# Altium PCB PCB-v1.PcbDoc
Units mm, origin at the board's own origin, x right, y up, seen from the top; angles counter-clockwise.
Board outline 50 x 50 mm, 2 copper layers (Top Layer, Bottom Layer); 47 components, 31 nets, 206 pads, 12 vias.
Unrouted connection lines stored in the file: 48.
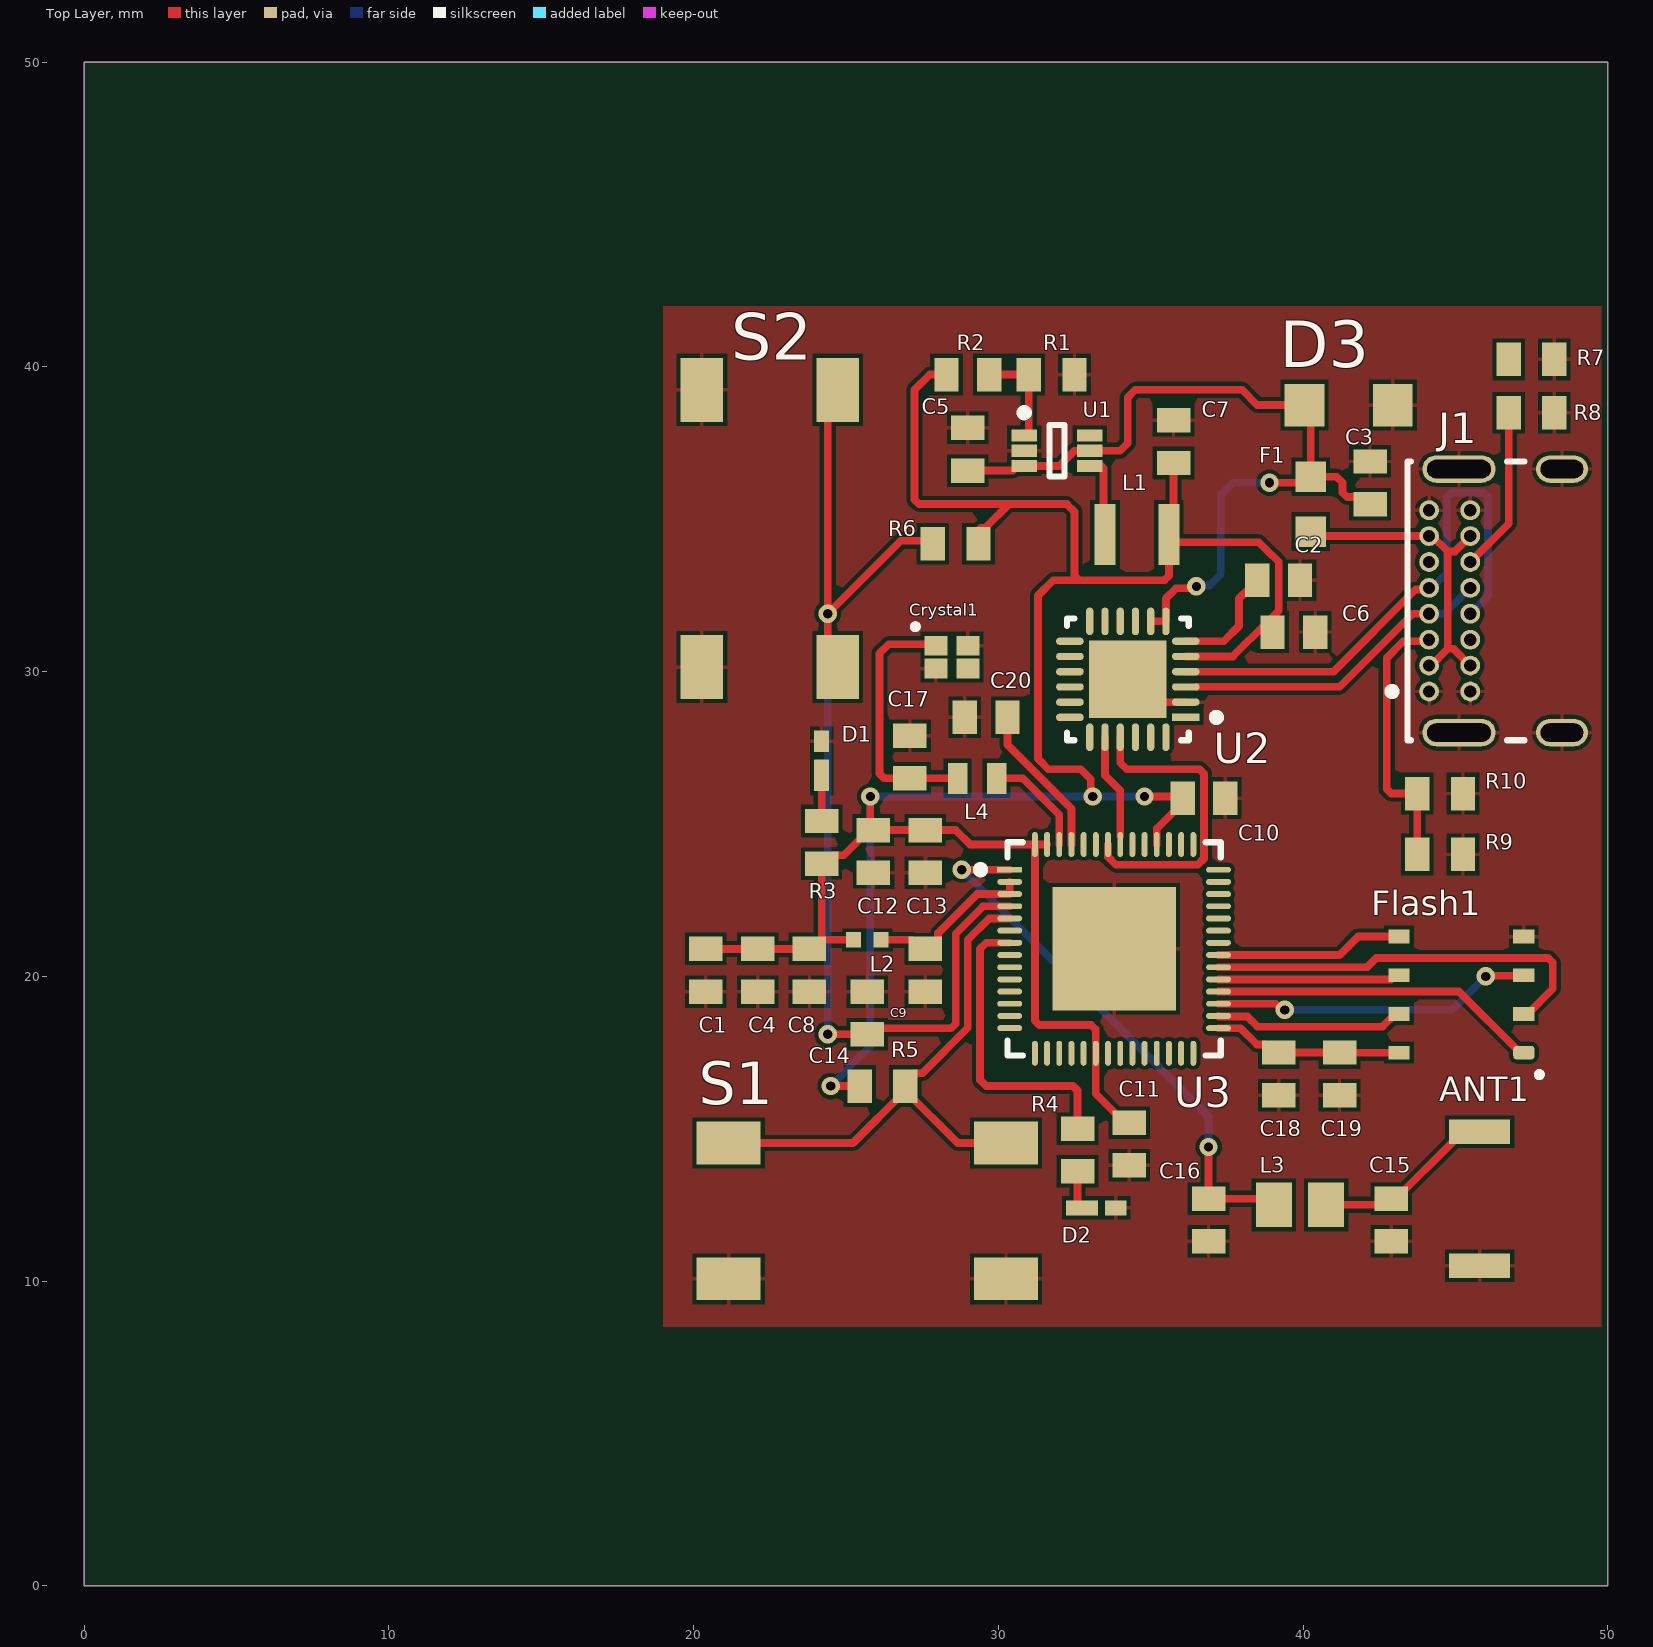
[diagram p0: Top Layer view]
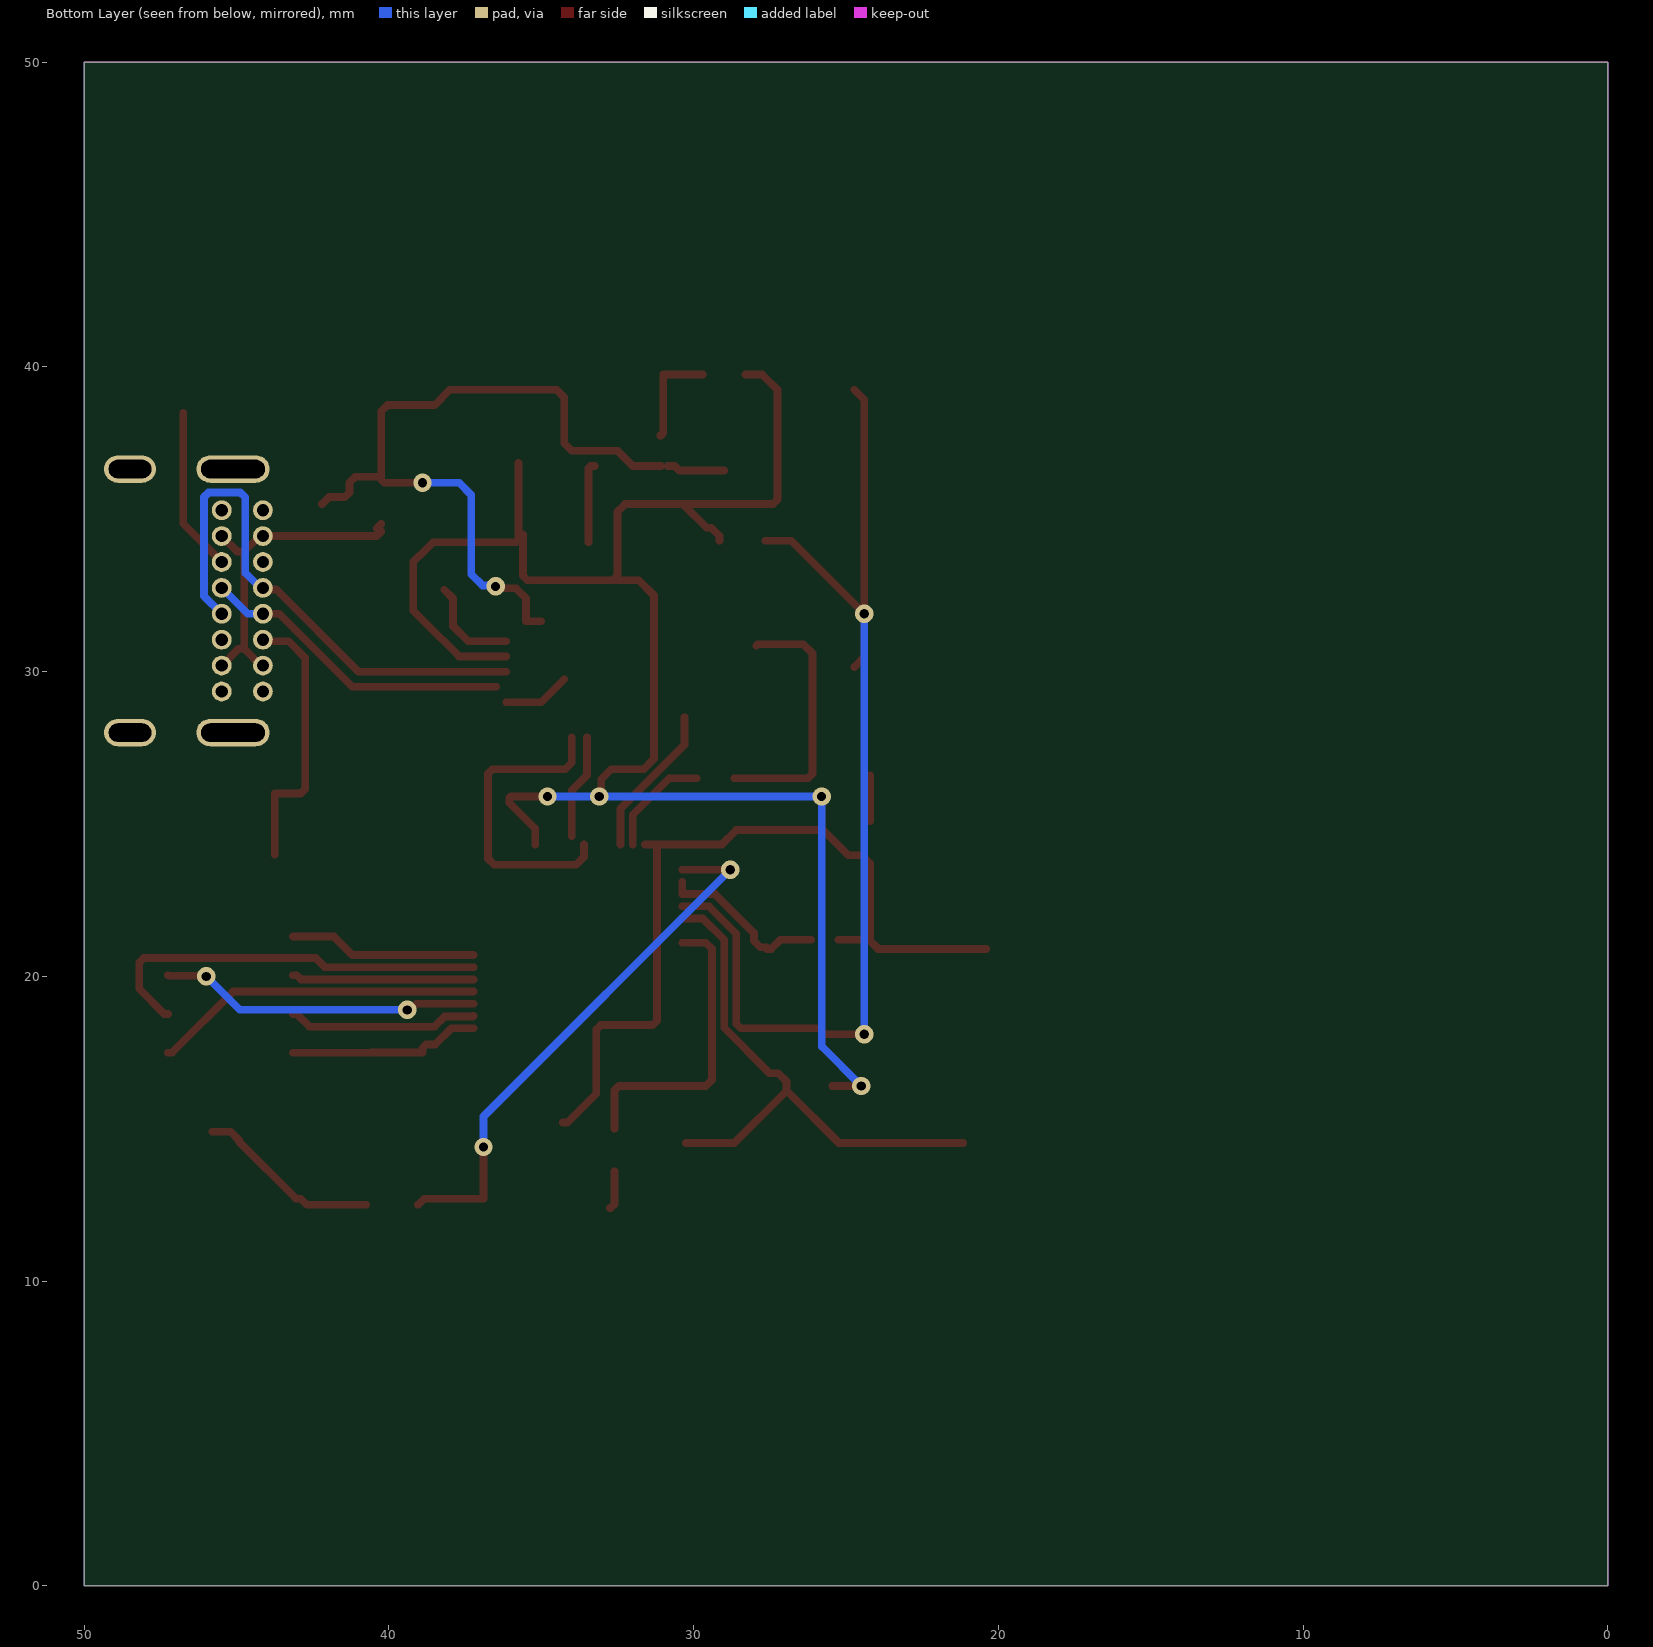
[diagram p1: Bottom Layer view, seen from below]

## Layer stack, top to bottom
Top Solder: solder mask 0.0102, Solder Resist, Dk 3.5
Top Layer: signal copper 0.0356
Dielectric 1: dielectric 0.32, FR-4, Dk 4.8
Bottom Layer: signal copper 0.0356
Bottom Solder: solder mask 0.0102, Solder Resist, Dk 3.5

## Board outline
0,0 50,0 50,50 0,50

## Design rules (kind name [scope] priority, off if disabled: settings)
BoardOutlineClearance [All] p1: gap=0.2 ignorepadtopadclearanceinfootprint=FALSE
Clearance [All] p1: gap=0.127 ignorepadtopadclearanceinfootprint=TRUE except(0.254: Arc-Hole Track-Hole SMDPad-Hole THPad-Hole Via-Hole Fill-Hole Poly-Hole Region-Hole Text-Hole)
ComponentClearance [All] p1: gap=0.127 collisioncheckmode=3 verticalgap=0.127 showdistances=TRUE
DiffPairsRouting [All] p1: maxlimit=0.254 minlimit=0.127 mostfreqgap=0.127 toplayer_minwidth=0.127 toplayer_maxwidth=25.4 toplayer_prefwidth=0.127 bottomlayer_minwidth=0.127 bottomlayer_maxwidth=25.4 bottomlayer_prefwidth=0.127 maxuncoupledlength=12.7
Height [All] p1: minheight=0 maxheight=1816.048 prefheight=12.7
HoleSize [All] p1: absolutevalues=TRUE maxlimit=6.3 minlimit=0.3 maxpercent=80.000 minpercent=20.000
HoleToHoleClearance [All] p1: gap=0.254 allowstackedmicrovias=FALSE
MinimumAnnularRing [All] p1: minimumring=0.152
MinimumSolderMaskSliver [All] p1: minsoldermaskwidth=0.152
PlaneClearance [All] p1: clearance=0.127
PlaneConnect PlaneConnectPowerPads [InPadClass('PowerPads')] p1: planeconnectstyle=Direct reliefexpansion=0.508 reliefentries=4 reliefconductorwidth=0.254 reliefairgap=0.254
PlaneConnect [All] p2: pad.planeconnectstyle=Relief pad.reliefexpansion=0.3 pad.reliefentries=4 pad.reliefconductorwidth=0.127 pad.reliefairgap=0.127 via.planeconnectstyle=Direct via.reliefexpansion=0.3 via.reliefentries=4 via.reliefconductorwidth=0.127 via.reliefairgap=0.127
PolygonConnect PolygonConnectPowerPads [All vs (InPadClass('PowerPads'))] p1: connectstyle=Direct reliefconductorwidth=0.254 reliefentries=4 polygonreliefangle="90 Angle" airgapwidth=0.254
PolygonConnect [All] p2: thpad.connectstyle=Relief thpad.reliefconductorwidth=0.127 thpad.reliefentries=4 thpad.polygonreliefangle="90 Angle" thpad.airgapwidth=0.127 smdpad.connectstyle=Relief smdpad.reliefconductorwidth=0.127 smdpad.reliefentries=4 smdpad.polygonreliefangle="90 Angle" smdpad.airgapwidth=0.127 via.connectstyle=Direct via.reliefconductorwidth=0.127 via.reliefentries=4 via.polygonreliefangle="90 Angle" via.airgapwidth=0.127
RoutingVias [All] p1: holewidth=0.3 width=0.6 viastyle="Through Hole" minholewidth=0.3 minwidth=0.6 maxholewidth=0.6 maxwidth=6.6
SilkToSilkClearance [All] p1: silktosilkclearance=0.127
SilkToSolderMaskClearance [IsPad] p1: minsilkscreentomaskgap=0.127 clearancetoexposedcopper=TRUE
SolderMaskExpansion [All] p1: expansion=0.051 istentingtop=FALSE
SupplyNets "Schematic Supply Nets_4" [InNet('+3.3V')] p1: voltage=0.000
SupplyNets "Schematic Supply Nets_1" [InNet('GND')] p2: voltage=0.000
UnRoutedNet [All] p1: checkbadconnections=TRUE
Width Width_10mil [All] p1: maxlimit=25.4 minlimit=0.254 preferedwidth=0.254 minimp=50.000000 maximp=50.000000 favimp=50.000000
Width Width_6mil [All] p2: maxlimit=25.4 minlimit=0.152 preferedwidth=0.152 minimp=50.000000 maximp=50.000000 favimp=50.000000
Width Power_20mil [All] p3: maxlimit=25.4 minlimit=0.508 preferedwidth=0.508 minimp=50.000000 maximp=50.000000 favimp=50.000000
Width Power_12mil [All] p4: maxlimit=25.4 minlimit=0.305 preferedwidth=0.305 minimp=50.000000 maximp=50.000000 favimp=50.000000
Width Width_5mil [All] p5: maxlimit=25.4 minlimit=0.127 preferedwidth=0.127 minimp=50.000000 maximp=50.000000 favimp=50.000000
19 further rules are at their usual default settings.

## Components (designator, comment, footprint, x,y, rotation, side; value= is the part's Value field where it differs from the comment)
ANT1 "PCB_ANT" "Antenne // RFANT5220110A0T" 45.8,12.7 r270 top
C1 "10µF" CAP_General_0603 20.4,20.2 r90 top
C2 "1µF" CAP_General_0603 39.2,33 r0 top
C3 "10pF" CAP_General_0603 42.2,36.2 r270 top
C4 "1µF" CAP_General_0603 22.1,20.2 r90 top
C5 "4.7µF" CAP_General_0603 29,37.3 r270 top
C6 "1µF" CAP_General_0603 39.7,31.3 r0 top
C7 "1µF" CAP_General_0603 35.75,37.55 r270 top
C8 "0.1µF" CAP_General_0603 23.8,20.2 r90 top
C9 "0.1µF" CAP_General_0603 27.6,20.2 r90 top
C10 "0.1µF" CAP_General_0603 36.75,25.85 r0 top
C11 "0.1µF" CAP_General_0603 34.3,14.5 r90 top
C12 "1µF" CAP_General_0603 25.9,24.1 r90 top
C13 "10nF" CAP_General_0603 27.6,24.1 r90 top
C14 "0.1µF" CAP_General_0603 25.7,18.8 r270 top
C15 "1pF" CAP_General_0603 42.9,12 r90 top
C16 "1pF" CAP_General_0603 36.9,12 r90 top
C17 "10pF" CAP_General_0603 27.1,27.2 r90 top
C18 "0.1µF" CAP_General_0603 39.2,16.8 r90 top
C19 "10µF" CAP_General_0603 41.2,16.8 r90 top
C20 "10pF" CAP_General_0603 29.6,28.5 r180 top
Crystal1 "Crystal" "Crystal // ECS­400­8­47B2­CKM­TR" 28.475,30.475 r0 top
D1 "LED" "LED // KRDELPS1.22-UIVG-46-H3Q4-XX" 24.2,27.157 r90 top
D2 "LED" "LED // KRDELPS1.22-UIVG-46-H3Q4-XX" 33.3,12.4 r0 top
D3 "ESD diode 5V" "ESD diode 5V // SMF5.0A" 41.5,38.75 r0 top
F1 "Fuse" "Fuse // 0603L050SLYR" 40.25,35.5 r90 top
Flash1 "128 Mbit NOR Flash" "128 Mbit NOR Flash // AT25QF128A-MHB-T" 45.2,19.4 r180 top
J1 "USB4085-GF-A" "USB-C connector // USB4085-GF-A" 48.165,32.325 r90 top
L1 "1µH" "Inductor 1µH // MLP2520H1R0MT0S1" 34.55,34.5 r0 top
L2 "2nH" "Inductor 2nH // MLG1005S2N0BTD25" 25.7,21.2 r0 top
L3 "3.3nH" "Inductor 3.3nH // AIMC-0805-3N3" 39.9,12.5 r180 top
L4 "24nH" "Inductor 24 nH // 36501J24NJTDG" 29.3,26.5 r0 top
R1 "100K" RES_100K_0603 31.75,39.75 r180 top
R2 "453K" RES_453K_0603 29,39.75 r180 top
R3 "499R" RES_499R_0603 24.2,24.4 r90 top
R4 "499R" RES_499R_0603 32.6,14.3 r270 top
R5 "10K" RES_10K_0603_1 26.2,16.4 r0 top
R6 "10K" RES_10K_0603_1 28.6,34.2 r0 top
R7 "10K" RES_10K_0603_1 47.5,40.25 r180 top
R8 "10K" RES_10K_0603_1 47.5,38.5 r180 top
R9 "10K" RES_10K_0603_1 44.5,24 r180 top
R10 "10K" RES_10K_0603_1 44.5,26 r180 top
S1 "Drukknop" "Tactile Switches // FSM4JSMAATR" 25.7,12.3 r90 top
S2 "Drukknop" "Tactile Switches // FSM4JSMAATR" 22.5,34.7 r0 top
U1 "Convertor 5V-3.3V" "CONVERTOR // TLV62569APDRLR" 31.925,37.25 r0 top
U2 "CP2102N-A02-GQFN24R" "USB Bridge // CP2102N-A02-GQFN24R" 34.25,29.75 r180 top
U3 "ESP32-S3R8" FP-ESP32-S3R8 33.8,20.9 r0 top

## Footprints (in the part's own frame and the unit in brackets; to place one, negate y for a bottom-side part, rotate by r counter-clockwise, add the part's x,y. Pads: shape width x height; smd on the part's side, far side on the other; paste and mask are expansions set on the pad)
"128 Mbit NOR Flash // AT25QF128A-MHB-T" [mm]
  rrect50% 0.7x0.45 smd: 1(-2.05,1.905)
  rect 0.7x0.45 smd: 2(-2.05,0.635) 3(-2.05,-0.635) 4(-2.05,-1.905) 5(2.05,-1.905) 6(2.05,-0.635) 7(2.05,0.635) 8(2.05,1.905)
  silkscreen extent -2.64,2.55 -2.48,2.71
"Antenne // RFANT5220110A0T" [mm]
  rect 0.8x2 smd: 1(-2.2,0) 2(2.2,0)
CAP_General_0603 [mm] "Chip Capacitor, 2-Leads, Body 1,60x0,80mm, IPC Medium Density"
  rect 0.8x1.1 smd: 1(-0.7,0) 2(0.7,0)
  body extent -0.85,-0.45 0.85,0.45, height 0.7
"CONVERTOR // TLV62569APDRLR" [mm] "SOT23, 6-Leads, Body 1,60x2,15mm, Pitch 0,50mm, IPC Medium Density"
  rect 0.85x0.4 smd: 1(-1.075,0.5) 2(-1.075,0) 3(-1.075,-0.5) 4(1.075,-0.5) 5(1.075,0) 6(1.075,0.5)
  silkscreen extent -1.2,-0.85 0.25,1.37, body extent -0.65,-0.85 0.65,0.85, height 0.6
"Crystal // ECS­400­8­47B2­CKM­TR" [mm] "40 MHz Crystal"
  rect 0.75x0.65 smd: 1(-0.525,0.375) 2(-0.525,-0.375) 3(0.525,-0.375) 4(0.525,0.375)
  silkscreen extent -1.28,0.92 -1.12,1.08
"ESD diode 5V // SMF5.0A" [mm]
  rect 1.3x1.4 smd: 1(-1.45,0) 2(1.45,0)
FP-ESP32-S3R8 [mm]
  rect 0.818x0.192 smd paste+0 mask+0: 1(-3.427,2.6)
  rrect100% 0.818x0.192 smd paste+0 mask+0: 2(-3.427,2.2) 3(-3.427,1.8) 4(-3.427,1.4) 5(-3.427,1) 6(-3.427,0.6) 7(-3.427,0.2) 8(-3.427,-0.2) 9(-3.427,-0.6) 10(-3.427,-1) 11(-3.427,-1.4) 12(-3.427,-1.8) 13(-3.427,-2.2) 14(-3.427,-2.6) 29(3.427,-2.6) 30(3.427,-2.2) 31(3.427,-1.8) 32(3.427,-1.4) 33(3.427,-1) 34(3.427,-0.6) 35(3.427,-0.2) 36(3.427,0.2) 37(3.427,0.6) 38(3.427,1) 39(3.427,1.4) 40(3.427,1.8) 41(3.427,2.2) 42(3.427,2.6)
  rrect100% 0.192x0.818 smd paste+0 mask+0: 15(-2.6,-3.427) 16(-2.2,-3.427) 17(-1.8,-3.427) 18(-1.4,-3.427) 19(-1,-3.427) 20(-0.6,-3.427) 21(-0.2,-3.427) 22(0.2,-3.427) 23(0.6,-3.427) 24(1,-3.427) 25(1.4,-3.427) 26(1.8,-3.427) 27(2.2,-3.427) 28(2.6,-3.427) 43(2.6,3.427) 44(2.2,3.427) 45(1.8,3.427) 46(1.4,3.427) 47(1,3.427) 48(0.6,3.427) 49(0.2,3.427) 50(-0.2,3.427) 51(-0.6,3.427) 52(-1,3.427) 53(-1.4,3.427) 54(-1.8,3.427) 55(-2.2,3.427) 56(-2.6,3.427)
  rect 4.05x4.05 smd paste-1000 mask+0: 57(0,0)
  silkscreen extent -4.51,-3.5 3.5,3.5, body extent -4.1,-4.09 4.07,4.09, height 0.25
"Fuse // 0603L050SLYR" [mm]
  rect 1x1 smd: 1(-0.9,0) 2(0.9,0)
"Inductor 1µH // MLP2520H1R0MT0S1" [mm]
  rect 0.7x2 smd: 1(-1.05,0) 2(1.05,0)
"Inductor 2nH // MLG1005S2N0BTD25" [mm]
  rect 0.5x0.5 smd: 1(-0.45,0) 2(0.45,0)
"Inductor 3.3nH // AIMC-0805-3N3" [mm] "Chip Inductor, 2-Leads, Body 2,00x1,25mm, IPC Medium Density"
  rect 1.19x1.47 smd: 1(-0.855,0) 2(0.855,0)
  body extent -1.1,-0.72 1.1,0.72, height 1.05
"Inductor 24 nH // 36501J24NJTDG" [mm]
  rect 0.64x1.02 smd: 1(-0.64,0) 2(0.64,0)
"LED // KRDELPS1.22-UIVG-46-H3Q4-XX" [mm]
  rect 1.05x0.5 smd: 1(-0.557,0)
  rect 0.7x0.5 smd: 2(0.557,0)
RES_10K_0603_1 [mm] "Chip Resistor, 2-Leads, Body 1,55x0,80mm, IPC Medium Density"
  rect 0.8x1.1 smd: 1(-0.75,0) 2(0.75,0)
  body extent -0.83,-0.45 0.82,0.45, height 0.55
RES_100K_0603 [mm] "Chip Resistor, 2-Leads, Body 1,60x0,80mm, IPC Medium Density"
  rect 0.8x1.1 smd: 1(-0.75,0) 2(0.75,0)
  body extent -0.9,-0.5 0.9,0.5, height 0.65
RES_453K_0603 [mm] "Chip Resistor, 2-Leads, Body 1,55x0,80mm, IPC Medium Density"
  rect 0.8x1.1 smd: 1(-0.7,0) 2(0.7,0)
  body extent -0.83,-0.45 0.82,0.45, height 0.55
RES_499R_0603 [mm] "Chip Resistor, 2-Leads, Body 1,55x0,85mm, IPC Medium Density"
  rect 0.8x1.1 smd: 1(-0.7,0) 2(0.7,0)
  body extent -0.8,-0.48 0.8,0.47, height 0.55
"Tactile Switches // FSM4JSMAATR" [mm]
  rect 1.4x2.1 smd: 1(2.23,4.55) 2(2.23,-4.55) 3(-2.23,4.55) 4(-2.23,-4.55)
"USB Bridge // CP2102N-A02-GQFN24R" [mm]
  rect 0.91x0.239 smd paste+0 mask+0: 1(-1.901,1.25)
  rrect100% 0.91x0.239 smd paste+0 mask+0: 2(-1.901,0.75) 3(-1.901,0.25) 4(-1.901,-0.25) 5(-1.901,-0.75) 6(-1.901,-1.25) 13(1.901,-1.25) 14(1.901,-0.75) 15(1.901,-0.25) 16(1.901,0.25) 17(1.901,0.75) 18(1.901,1.25)
  rrect100% 0.239x0.91 smd paste+0 mask+0: 7(-1.25,-1.901) 8(-0.75,-1.901) 9(-0.25,-1.901) 10(0.25,-1.901) 11(0.75,-1.901) 12(1.25,-1.901) 19(1.25,1.901) 20(0.75,1.901) 21(0.25,1.901) 22(-0.25,1.901) 23(-0.75,1.901) 24(-1.25,1.901)
  rect 2.55x2.55 smd paste-1000 mask+0: 25(0,0)
  silkscreen extent -3.03,-2 2,2, body extent -2.61,-2.61 2.61,2.61, height 0.25
"USB-C connector // USB4085-GF-A" [mm]
  rrect100% 0.9x2.4 hole 2.1 slot 0.6 at 0 deg paste-2539.97 mask+0: 1(-4.325,3.045) 2(4.325,3.045)
  rrect100% 0.9x1.7 hole 1.4 slot 0.6 at 0 deg paste-2539.97 mask+0: 3(-4.325,-0.335) 4(4.325,-0.335)
  round 0.65 hole 0.4 paste-2539.97 mask+0: A1(-2.975,4.025) A4(-2.125,4.025) A5(-1.275,4.025) A6(-0.425,4.025) A7(0.425,4.025) A8(1.275,4.025) A9(2.125,4.025) A12(2.975,4.025) B1(2.975,2.675) B4(2.125,2.675) B5(1.275,2.675) B6(0.425,2.675) B7(-0.425,2.675) B8(-1.275,2.675) B9(-2.125,2.675) B12(-2.975,2.675)
  silkscreen extent -4.57,0.89 4.57,5.37, body extent -4.87,-4.83 4.87,4.83, height 0.25

## Part data
ANT1: library part "Antenne // RFANT5220110A0T"
C1 C2 C3 C4 C5 C6 C7 C8 C9 C10 C11 C12 C13 C14 C15 C16 C17 C18 C19 C20: library part CAP_General_0603, "Capacitor SMD 0603 ?pF"
Crystal1: library part "Crystal // ECS­400­8­47B2­CKM­TR"
D1 D2: library part "LED // KRDELPS1.22-UIVG-46-H3Q4-XX"
D3: library part "ESD diode 5V // SMF5.0A"
F1: library part "Fuse // 0603L050SLYR"
Flash1: library part "128 Mbit NOR Flash // AT25QF128A-MHB-T"
J1: library part "USB-C connector // USB4085-GF-A", "CONN RCPT USB2.0 TYPE C 24POS RA", Contact Material="Copper Alloy", Contact Plating=Gold, Gender=Receptacle, Number of Positions=16, Orientation="Right Angle", USB Standard="USB 2.0"
L1: library part "Inductor 1µH // MLP2520H1R0MT0S1"
L2: library part "Inductor 2nH // MLG1005S2N0BTD25"
L3: library part "Inductor 3.3nH // AIMC-0805-3N3"
L4: library part "Inductor 24 nH // 36501J24NJTDG"
R1: library part RES_100K_0603, "Resistor SMD 0603 100K"
R2: library part RES_453K_0603, "Resistor SMD 0603 453K"
R3 R4: library part RES_499R_0603, "Resistor SMD 0603 499R"
R5 R6 R7 R8 R9 R10: library part RES_10K_0603_1, "Resistor SMD 0603 10K"
S1 S2: library part "Tactile Switches // FSM4JSMAATR"
U1: library part "Convertor // TLV62569APDRLR"
U2: library part "USB Bridge // CP2102N-A02-GQFN24R", "IC USB TO UART BRIDGE QFN24", Ambient Temperature Range High=85°C, Manufacturer Lifecycle Status="FULL PRODUCTION", Max Junction Temperature (Tj)=105°C, Max Supply Voltage=3.6V, Min Operating Temperature=-40°C, Min Supply Voltage=1.71V, Height=800µm, Interface="I2C, RS-485, UART, USB", Lifecycle Status=Production, Max Operating Temperature=85°C, NexarPartId=99772192, Number of Digital IO=4, Schedule B="8542390000, 8542390000|8542390000|8542390000|8542390000|8542390000"
U3: library part ESP32-S3, "ESP32-S3R8 RF System on a Chip - SoC SMD IC, Dual-Core MCU, Wi-Fi 2.4G BLE 5.0 Combo", NexarPartId=118292493

## Via types
v1: diameter 0.6, hole 0.3, Top Layer to Bottom Layer, 12 vias

## Nets (pads, with @x,y where several pads share a name; then routed paths per layer and width w, separated by ;. In a path a pad name is that pad's centre, name@x,y a point inside that pad or via, vN(x,y) a via of type N, cw(c..) or ccw(c..) an arc to the next point about the centre after c; other vN are vias at no path point)
+3.3V: C1.2 C4.2 C6.1 C7.2 C8.2 C10.1 C11.2 C12.2 C13.2 L1.2 L2.1 R2.2 R3.1 R5.1 R6.2 U2.5 U3.20 U3.46 U3.55 U3.56 | length 91.7
  Top Layer w0.254: C1.2 C4.2 C8.2 23.927,20.9 24.2,21.173 R3.1 24.473,23.973 24.923,23.973 25.75,24.8 C12.2 ; C8.2@23.95,20.9 24.25,21.2 L2.1 ; v1(24.5,16.4) R5.1 ; v1(25.8,25.9) 25.8,24.9 C12.2 ; R2.2 27.75,39.75 27.25,39.25 27.25,35.649 27.399,35.5 30.35,35.5 ; R6.2@29.15,34.3 29.15,34.45 29.423,34.723 29.573,34.723 30.35,35.5 ; U3.55 U3.56 ; v1(33.1,25.9) 33.034,25.966 33.034,26.466 32.7,26.8 31.639,26.8 31.3,27.139 31.3,32.5 31.8,33 32.649,33 ; C11.2 34.15,15.2 33.2,16.15 U3.20 33.2,18.251 33.051,18.4 31.349,18.4 31.2,18.549 U3.56 ; v1(34.8,25.9) 36,25.9 C10.1 36.05,25.7 35.2,24.85 U3.46 ; L1.2 L1.2@35.6,34.473 ; C7.2 L1.2@35.75,34.323 ; U2.5 37.7,30.5 38.825,31.625 39.2,32 39.2,33.609 39.005,33.804 38.996,33.804 38.55,34.25 35.823,34.25 L1.2@35.75,34.323 ; C12.2 C13.2 28.6,24.8 29.073,24.327 U3.56 ; 30.35,35.5 32.25,35.5 32.5,35.25 32.5,33.149 32.649,33 ; 32.649,33 35.451,33 35.6,33.149 L1.2@35.6,34.473 ; L1.2@35.6,34.473 L1.2@35.75,34.323
  Bottom Layer w0.254: v1(24.5,16.4) 25.8,17.7 v1(25.8,25.9) v1(33.1,25.9) v1(34.8,25.9)
+5V: C3.2 C5.2 D3.1 F1.2 U1.3 U1.5 U2.7 U2.8 | length 27.1
  Top Layer w0.254: C5.2 30.475,36.6 30.625,36.75 U1.3 ; U1.3@31.073,36.75 32,36.75 32.5,37.25 U1.5 34,37.25 34.25,37.5 34.25,39 34.5,39.25 38,39.25 38.5,38.75 D3.1 40.25,38.55 F1.2 41.1,36.4 41.3,36.2 41.3,35.878 41.449,35.73 41.97,35.73 C3.2 ; U2.8 U2.7 35.5,32.4 35.834,32.734 36.434,32.734 v1(36.5,32.8) ; v1(38.9,36.2) 40.15,36.2 F1.2@40.25,36.3
  Bottom Layer w0.254: v1(36.5,32.8) 36.528,32.828 36.928,32.828 37.3,33.2 37.3,35.8 37.7,36.2 v1(38.9,36.2)
GND: ANT1.2 C1.1 C2.2 C3.1 C4.1 C5.1 C6.2 C7.1 C8.1 C9.1 C10.2 C11.1 C12.1 C13.1 C14.1 C15.1 C16.1 C17.2 C18.1 C19.1 C20.2 Crystal1.2 Crystal1.4 D1.2 D2.2 D3.2 Flash1.4 J1.1 J1.2 J1.3 J1.4 J1.A1 J1.A12 J1.B1 J1.B12 R1.1 R7.1 R8.1 R9.1 R10.1 S1.3 S1.4 S2.3 S2.4 U1.2 U2.2 U2.25 U3.57 | length 2.2
  Top Layer w0.254: U2.25 35,29 U2.2
NetANT1_1: ANT1.1 C15.2 L3.1 | length 6.1
  Top Layer w0.254: L3.1 42.7,12.5 C15.2 43.05,12.7 44.927,14.577 44.927,14.627 45.2,14.9 ANT1.1
NetC2_1: C2.1 U2.6 | length 3.3
  Top Layer w0.254: U2.6 37.4,31 37.9,31.5 37.9,32.4 C2.1@38.19,32.69
NetC9_2: C9.2 L2.2 U3.2 U3.3 | length 5.6
  Top Layer w0.254: L2.2 27.15,21.2 27.45,20.9 C9.2 ; C9.2@27.6,20.959 27.809,20.959 28.023,21.173 28.023,21.423 29.3,22.7 U3.3 U3.2
NetC14_2: C14.2 R6.1 S2.1 S2.2 U3.4 | length 36.9
  Top Layer w0.254: v1(24.4,18.1) C14.2 25.9,18.3 28.451,18.3 28.6,18.449 28.6,21.4 29.5,22.3 U3.4 ; S2.2 24.4,30.48 v1(24.4,31.9) ; S2.1 24.4,38.92 v1(24.4,31.9) ; R6.1@27.65,34.3 26.8,34.3 v1(24.4,31.9)
  Bottom Layer w0.254: v1(24.4,18.1) v1(24.4,31.9)
NetC16_2: C16.2 L3.2 U3.1 | length 18
  Top Layer w0.254: v1(28.8,23.5) U3.1 ; v1(36.9,14.4) C16.2 38.845,12.7 L3.2
  Bottom Layer w0.254: v1(28.8,23.5) 36.9,15.4 v1(36.9,14.4)
NetC17_1: C17.1 Crystal1.1 L4.1 | length 8.6
  Top Layer w0.254: Crystal1.1 27.9,30.9 26.4,30.9 26.1,30.6 26.1,26.649 26.249,26.5 L4.1
NetC18_2: C18.2 C19.2 Flash1.8 U3.29 | length 6.3
  Top Layer w0.254: U3.29 37.95,18.3 38.485,17.765 38.777,17.765 38.9,17.642 38.9,17.5 40.6,17.5 40.605,17.495 Flash1.8
NetC20_1: C20.1 Crystal1.3 U3.53 | length 5
  Top Layer w0.254: C20.1 30.3,27.6 32.4,25.5 U3.53
NetD1_1: D1.1 R3.2 | length 1.5
  Top Layer w0.254: R3.2 D1.1
NetD2_1: D2.1 R4.2 | length 1.3
  Top Layer w0.254: R4.2 32.6,12.523 32.723,12.4 D2.1
NetFlash1_1: Flash1.1 U3.32 | length 10.9
  Top Layer w0.254: U3.32 45.12,19.5 47.125,17.495 Flash1.1
NetFlash1_2: Flash1.2 U3.34 | length 13.3
  Top Layer w0.254: U3.34 42.1,20.3 42.4,20.6 48.051,20.6 48.2,20.451 48.2,19.59 47.375,18.765 Flash1.2
NetFlash1_3: Flash1.3 U3.31 | length 10.6
  Top Layer w0.254: U3.31 39.106,19.1 39.306,18.9 v1(39.4,18.9) ; v1(46,20) 46.018,20.018 47.233,20.018 Flash1.3
  Bottom Layer w0.254: v1(39.4,18.9) 44.9,18.9 v1(46,20)
NetFlash1_5: Flash1.5 U3.35 | length 6.2
  Top Layer w0.254: U3.35 41.2,20.7 41.805,21.305 Flash1.5
NetFlash1_6: Flash1.6 U3.33 | length 6
  Top Layer w0.254: U3.33 42.89,19.9 43.025,20.035 Flash1.6
NetFlash1_7: Flash1.7 U3.30 | length 6.2
  Top Layer w0.254: U3.30 37.246,18.681 38.175,18.681 38.51,18.346 42.606,18.346 43.025,18.765 Flash1.7
NetJ1_A5: J1.A5 R9.2 R10.2 | length 9
  Top Layer w0.254: R9.2 R10.2 42.899,26 42.75,26.149 42.75,30.45 43.295,30.995 44.085,30.995 J1.A5
NetJ1_A6: J1.A6 J1.B6 U2.3 | length 10.4
  Top Layer w0.254: U2.3@36.479,29.507 41.207,29.507 43.6,31.9 J1.A6
  Bottom Layer w0.254: J1.A6 44.64,31.9 J1.B6
NetJ1_A7: J1.A7 J1.B7 U2.4 | length 17.9
  Top Layer w0.254: U2.4 41,30 43.7,32.7 44.09,32.7 J1.A7
  Bottom Layer w0.254: J1.A7 44.229,32.75 44.721,33.242 44.721,35.721 44.881,35.881 45.922,35.881 46.071,35.732 46.071,32.481 J1.B7
NetJ1_B5: J1.B5 R7.2 R8.2 | length 5.4
  Top Layer w0.254: J1.B5 46.75,34.86 R8.2
NetL1_1: L1.1 U1.4 | length 2.7
  Top Layer w0.254: U1.4@33.25,36.75 33.377,36.75 33.45,36.677 L1.1@33.45,34.25
NetL4_2: L4.2 U3.54 | length 3.6
  Top Layer w0.254: L4.2@29.9,26.5 30.8,26.5 32,25.3 U3.54
NetR1_2: R1.2 R2.1 U1.1 | length 3.4
  Top Layer w0.254: R2.1 R1.2 31,37.823 31.073,37.75 U1.1@31.1,37.75
NetR4_1: R4.1 U3.7 | length 10
  Top Layer w0.254: U3.7 29.6,21.1 29.4,20.9 29.4,16.6 29.6,16.4 32.451,16.4 32.6,16.251 R4.1
NetR5_2: R5.2 S1.1 S1.2 U3.5 | length 18.2
  Top Layer w0.254: S1.1 25.23,14.53 R5.2@26.95,16.25 ; S1.2 28.67,14.53 R5.2@26.95,16.25 ; U3.5 29.7,21.9 29,21.2 29,18.31 27.51,16.82 27.223,16.82 26.95,16.547 R5.2 R5.2@26.95,16.25
NetU2_20: U2.20 U3.49 | length 3.4
  Top Layer w0.254: U2.20 33.5,26.6 34,26.1 U3.49@34,24.609
NetU2_21: U2.21 U3.50 | length 10.3
  Top Layer w0.254: U3.50 33.6,23.919 33.855,23.664 36.545,23.664 36.75,23.869 36.75,26.651 36.601,26.8 34.213,26.8 34,27.013 U2.21
VBus: F1.1 J1.A4 J1.A9 J1.B4 J1.B9 | length 10.9
  Top Layer w0.254: F1.1 40.4,34.45 J1.A9 44.247,34.45 44.75,33.947 ; F1.1@40.25,34.85 F1.1@40.4,34.7 ; J1.A4 44.2,30.2 44.75,30.75 ; J1.B9 44.94,30.75 44.75,30.75 ; J1.B4 44.987,33.947 44.75,33.947 ; 44.75,30.75 44.75,33.947
pads on no net: J1.A8 J1.B8 U1.6 U2.1 U2.9 U2.10 U2.11 U2.12 U2.13 U2.14 U2.15 U2.16 U2.17 U2.18 U2.19 U2.22 U2.23 U2.24 U3.6 U3.8 U3.9 U3.10 U3.11 U3.12 U3.13 U3.14 U3.15 U3.16 U3.17 U3.18 U3.19 U3.21 U3.22 U3.23 U3.24 U3.25 U3.26 U3.27 U3.28 U3.36 U3.37 U3.38 U3.39 U3.40 U3.41 U3.42 U3.43 U3.44 U3.45 U3.47 U3.48 U3.51 U3.52

## Polygon pours and split planes (outlines as drawn)
GND on Top Layer "GND_L01_P002" (solid, remove dead copper, pour order 2): 19,8.5 50,8.5 50,42 19,42
no net on Top Layer "NONET_L01_P000" (solid, remove dead copper, shelved, pour order 0): 0,0 50,0 50,50 0,50
no net on Bottom Layer "NONET_L02_P001" (solid, remove dead copper, shelved, pour order 1): 0,0 50,0 50,50 0,50

## Keep-outs
Keep-Out Layer:
  lines w0.05: 0,0 0,50 50,50